# Altium PCB Power.PcbDoc
Units mm, origin at the board's own origin, x right, y up, seen from the top; angles counter-clockwise.
Board outline 60.5 x 33.5 mm, 2 copper layers (Top Layer, Bottom Layer); 11 components, 11 nets, 40 pads, 0 vias.
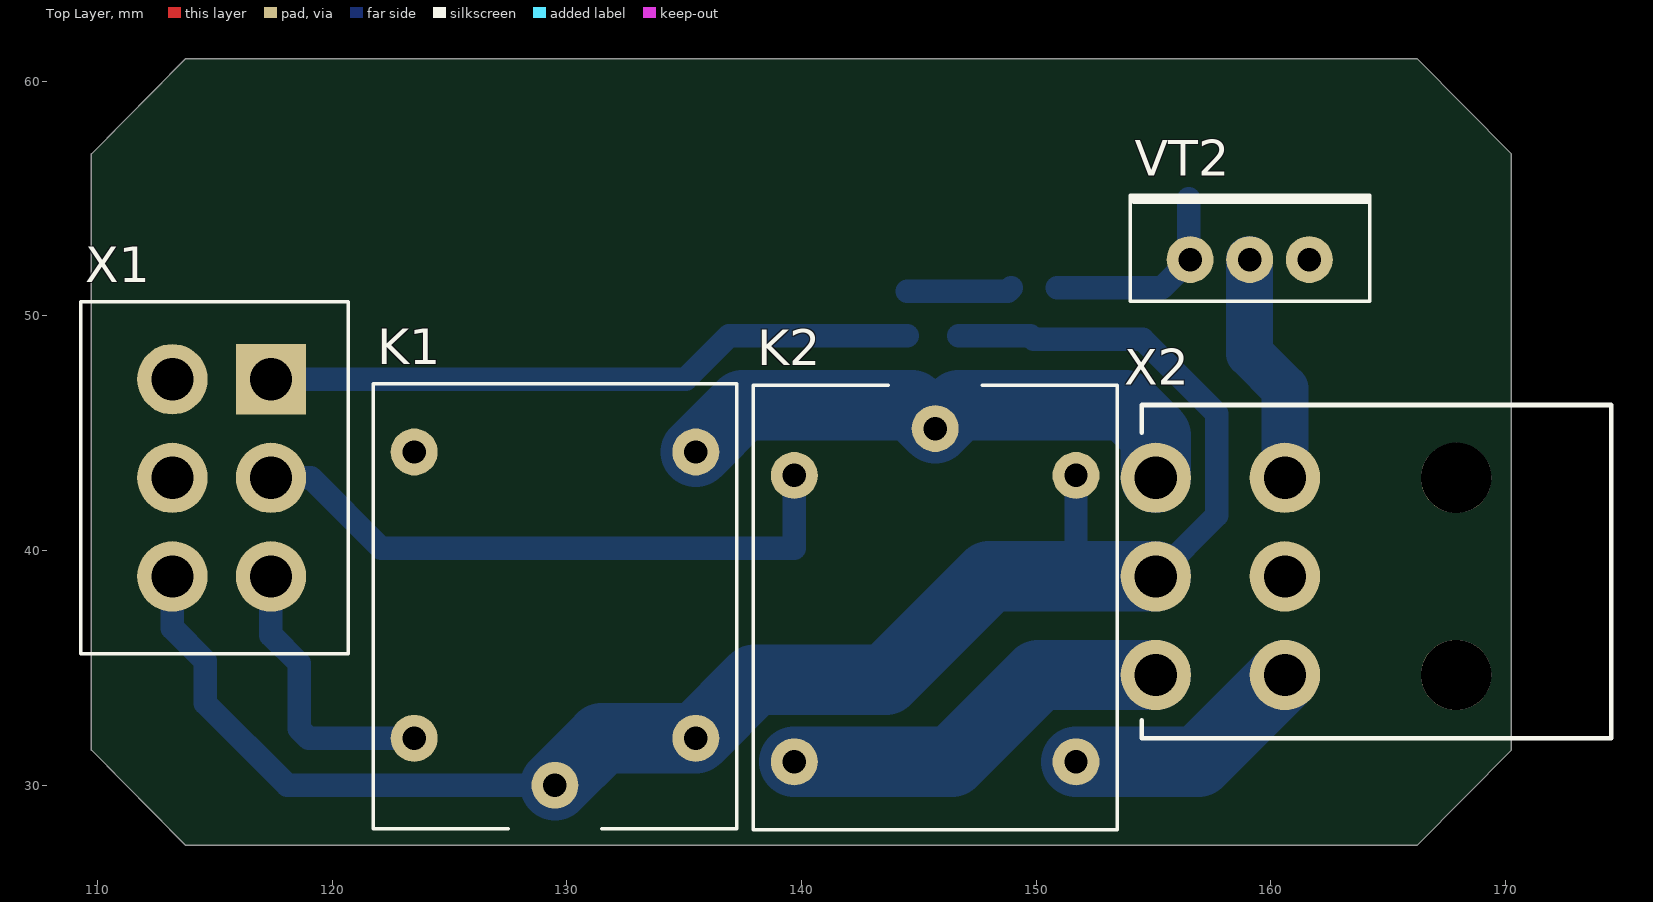
[diagram p0: Top Layer view]
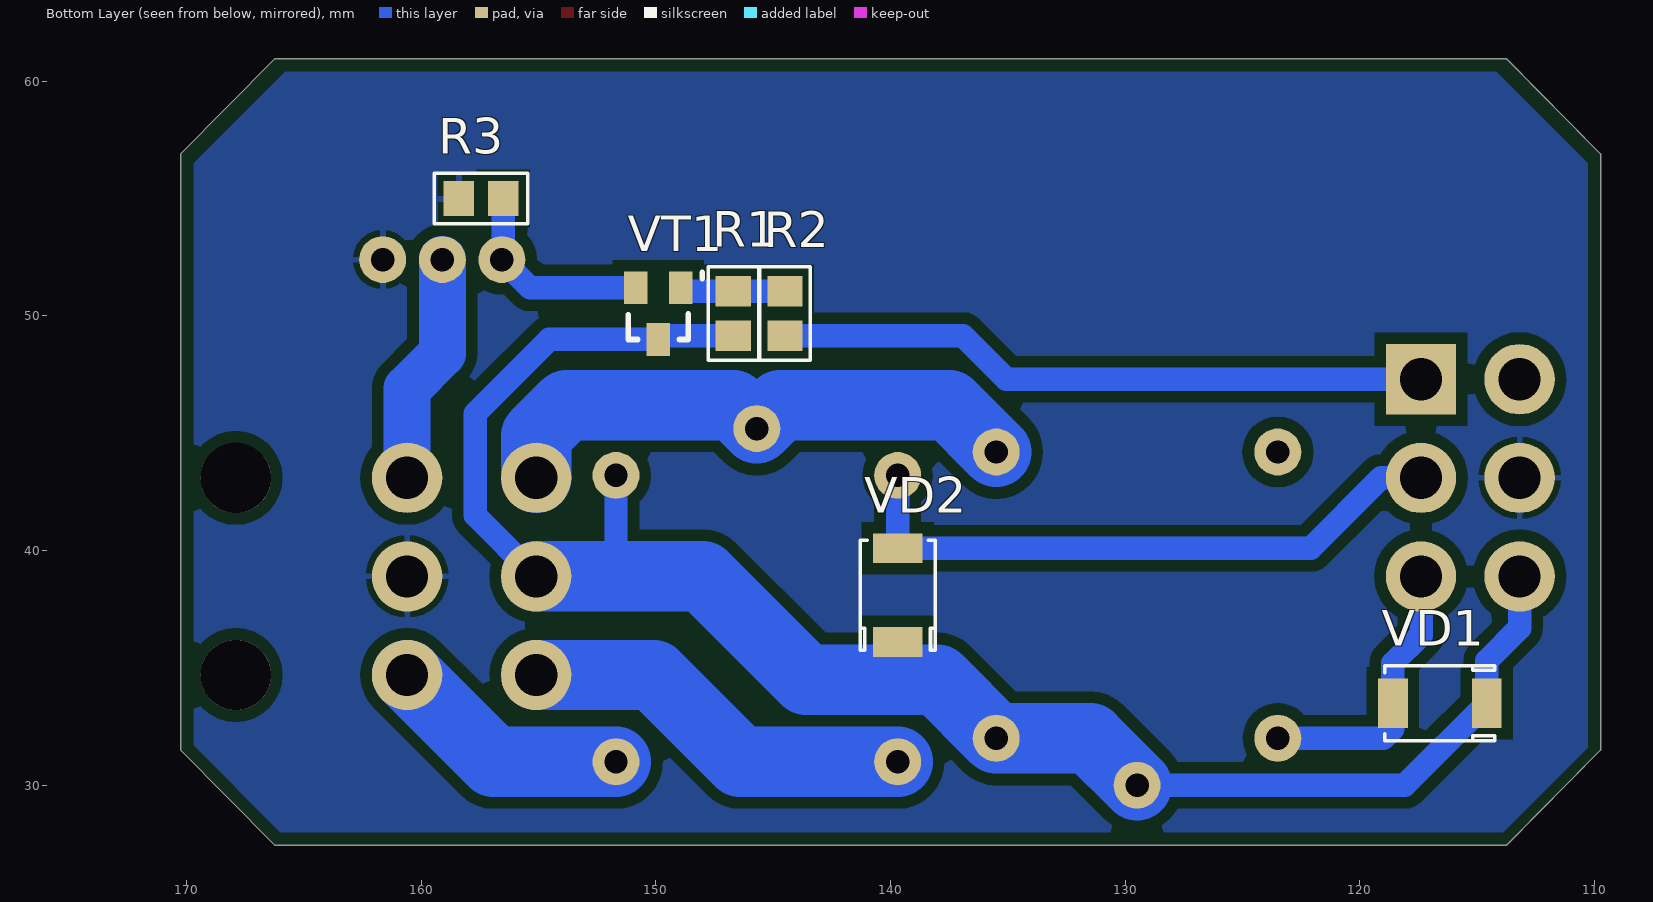
[diagram p1: Bottom Layer view, seen from below]
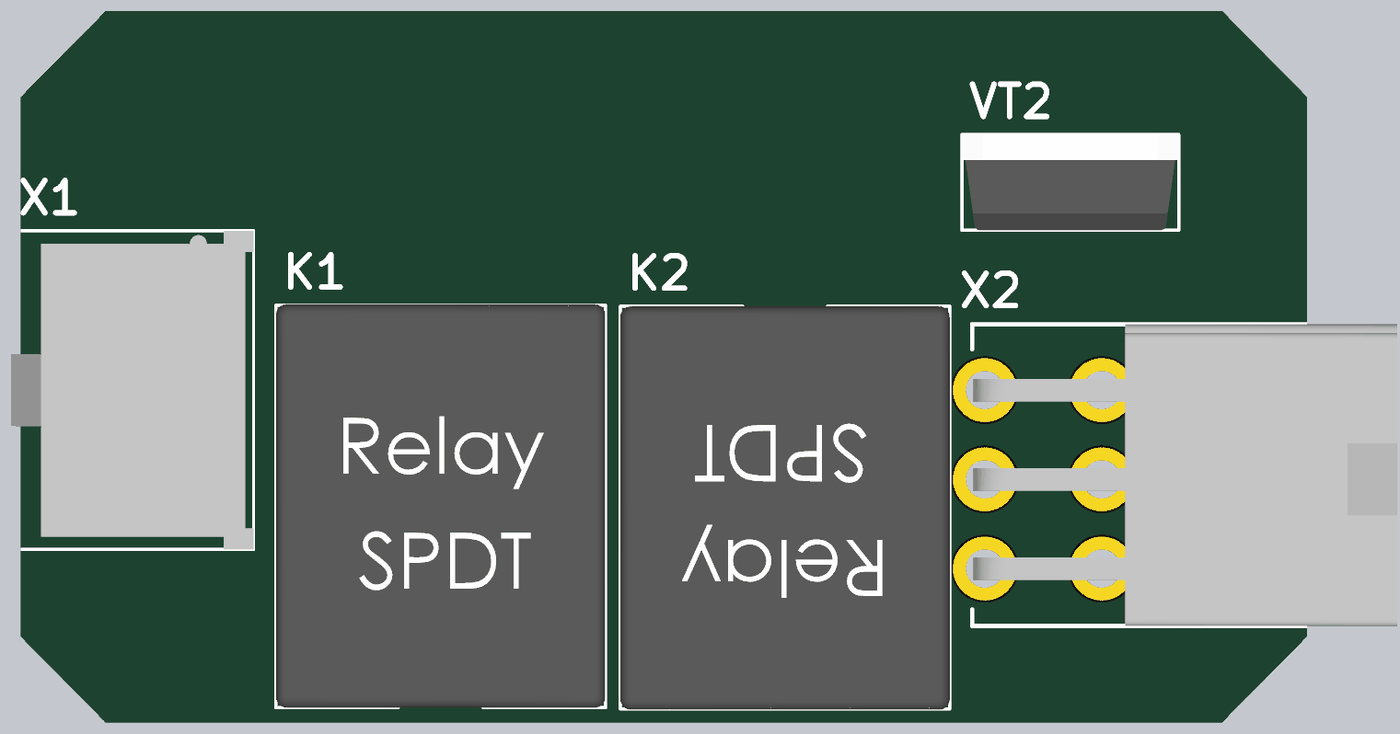
[diagram p2: 3D render of the assembled board from above, using the file's embedded part models]
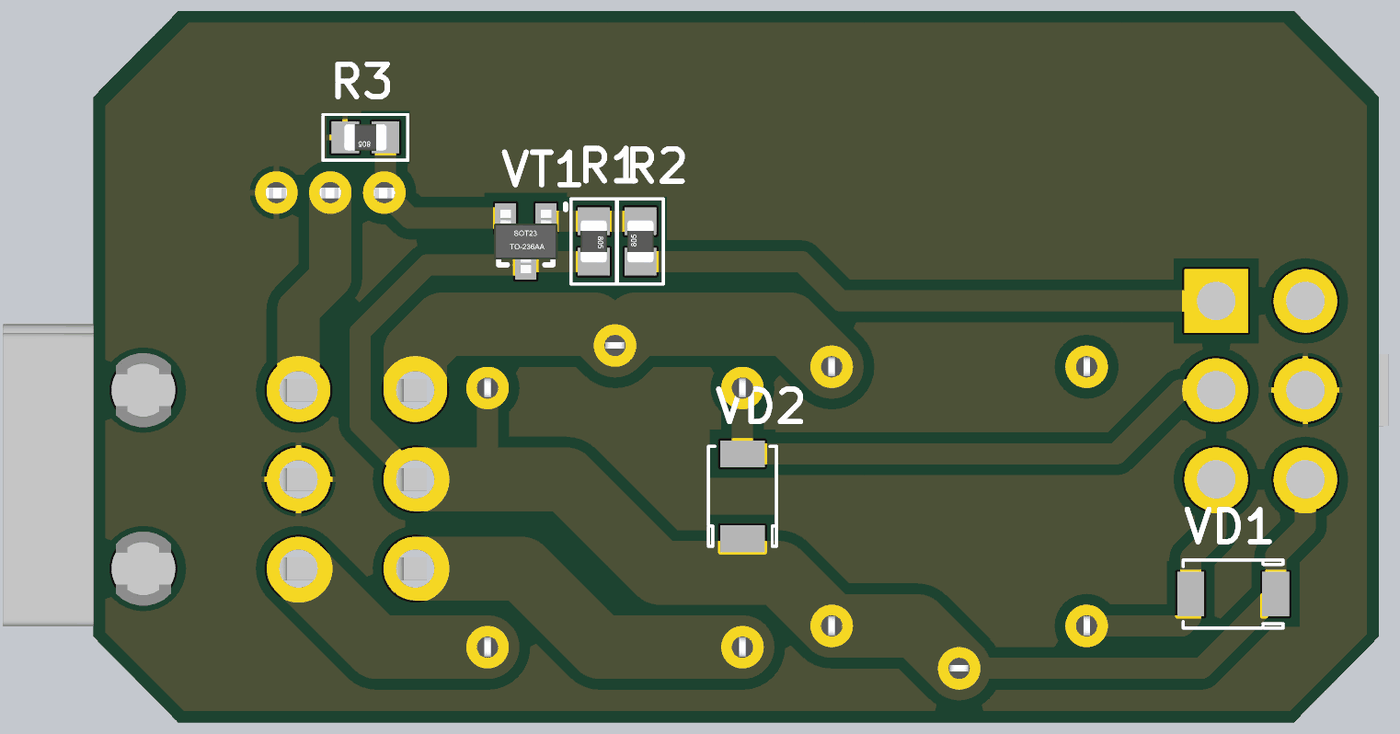
[diagram p3: 3D render of the assembled board from below, using the file's embedded part models]

## Layer stack, top to bottom
Top Solder: solder mask 0.0102, Solder Resist, Dk 3.5
Top Layer: signal copper 0.0356
Dielectric 1: dielectric 0.32, FR-4, Dk 4.8
Bottom Layer: signal copper 0.0356
Bottom Solder: solder mask 0.0102, Solder Resist, Dk 3.5

## Board outline
109.75,31.5 109.75,56.9 113.75,60.95 166.25,60.95 170.25,56.9 170.25,31.5 166.25,27.45 113.75,27.45

## Design rules (kind name [scope] priority, off if disabled: settings)
Clearance [All] p1: gap=0.5
PolygonConnect [All] p1: connectstyle=Relief reliefconductorwidth=0.254 reliefentries=4 polygonreliefangle="90 Angle" airgapwidth=0.254
RoutingVias [All] p1: holewidth=0.711 width=1.27 viastyle="Through Hole" minholewidth=0.711 minwidth=1.27 maxholewidth=0.711 maxwidth=1.27
SolderMaskExpansion [All] p1: expansion=0.102
Width [All] p1: maxlimit=6 minlimit=0.3 preferedwidth=0.5
30 further rules are at their usual default settings.

## Components (designator, comment, footprint, x,y, rotation, side; value= is the part's Value field where it differs from the comment)
K1 "Relay, SPDT" NRP07-C12D 129.5,38.1 r270 top
K2 "Relay, SPDT" NRP07-C12D 145.7,37.1 r90 top
R1 "Резистор" CHIP_0805_R 146.7,50.1 r270 bottom
R2 "Резистор" CHIP_0805_R 144.5,50.1 r90 bottom
R3 "Резистор" CHIP_0805_R 157.45,55 r0 bottom
VD1 "Diode, generic" SMA 116.6,33.5 r0 bottom
VD2 "Diode, generic" SMA 139.7,38.1 r90 bottom
VT1 "BJT, PNP" SOT-23 149.9,50.1 r0 bottom
VT2 "MOSFET, N-ch" TO-220 159.1,52.4 r0 top
X1 "MF 2x03 M(R)" "MF 2x03 V" 113.2,43.1 r90 top
X2 "MF 2x03 M(R)" "MF 2x03 R" 174.5,38.9 r90 top

## Footprints (in the part's own frame and the unit in brackets; to place one, negate y for a bottom-side part, rotate by r counter-clockwise, add the part's x,y. Pads: shape width x height; smd on the part's side, far side on the other; paste and mask are expansions set on the pad)
CHIP_0805_R [mm]
  rect 1.3x1.5 smd: 1(-0.95,0) 2(0.95,0)
  silkscreen extent -2,-1.08 2,1.07, body extent -1,-0.63 1,0.63, height 0.78
"MF 2x03 R" [mm]
  round 3 hole 1.8: 1(4.2,13.9) 2(0,13.9) 3(-4.2,13.9) 4(4.2,19.4) 5(0,19.4) 6(-4.2,19.4)
  round 3 hole 3 unplated: MH(-4.2,6.6) MH(4.2,6.6)
  silkscreen extent -6.9,0 7.3,20, body extent -6.9,0 7.3,19.93, height 11.4
"MF 2x03 V" [mm]
  rect 3x3 hole 1.8: 1(4.2,-4.2)
  round 3 hole 1.8: 2(0,-4.2) 3(-4.2,-4.2) 4(4.2,0) 5(0,0) 6(-4.2,0)
  silkscreen extent -7.5,-7.5 7.5,3.9, body extent -7.5,-7.5 7.5,3.9, height 13.5
NRP07-C12D [mm]
  round 2 hole 1 paste+0 mask+0: 1(6.1,-6) 2(6.1,6) 3(8.1,0) 4(-6.1,-6) 5(-6.1,6)
  silkscreen extent -9,-7.75 9.95,7.75, body extent -9.05,-7.75 9.95,7.75, height 15.81
SMA [mm]
  rect 1.27x2.1 smd: A(2,0) K(-2,0)
  silkscreen extent -2.35,-1.6 2.35,1.6
SOT-23 [mm]
  rect 1x1.4 smd: 1(-0.95,-1.1) 2(0.95,-1.1) 3(0,1.1)
  silkscreen extent -1.88,-1.75 1.28,1.1, body extent -1.5,-1.5 1.5,1.5, height 1.3
TO-220 [mm]
  round 2 hole 1 paste+0 mask+0: 1(-2.54,0) 2(0,0) 3(2.54,0)
  silkscreen extent -5.08,-1.77 5.12,2.73, body extent -5.08,-1.77 5.12,2.73, height 22.06

## Part data
K1 K2: "Реле, SPDT"
X1 X2: "MiniFit, 4.20mm 2x03"

## Nets (pads, with @x,y where several pads share a name; then routed paths per layer and width w, separated by ;. In a path a pad name is that pad's centre, name@x,y a point inside that pad or via, vN(x,y) a via of type N, cw(c..) or ccw(c..) an arc to the next point about the centre after c; other vN are vias at no path point)
BAT: K1.2 K1.3 K2.1 R1.2 VD1.K VD2.K VT1.3 X1.6 X2.5 | length 76.4
  Bottom Layer w1: X1.6 113.2,36.7 114.6,35.3 VD1.K 118.1,30 K1.3 ; R1.2 149.75,49.15 VT1.3 154.536,49 157.7,45.836 157.7,41.5 X2.5 ; K2.1 151.7,39.1 151.9,38.9
  Bottom Layer w3: K1.3 131.5,32 K1.2 138,34.5 143.6,34.5 148,38.9 151.9,38.9 X2.5
GND: R3.2 VT2.3 X1.5 X2.2
HORN: VT2.2 X2.1 | length 9.9
  Bottom Layer w2: VT2.2 159.1,48.4 160.6,46.9 X2.1
IG1: K2.4 X2.3 | length 10.4
  Bottom Layer w3: K2.4 156.9,31 X2.3
IG2: K1.5 K2.3 X2.4 | length 23.6
  Bottom Layer w3: K1.5 137.5,46.2 144.7,46.2 K2.3 146.7,46.2 153.8,46.2 155.1,44.9 X2.4
NetR1_1: R1.1 R2.2 VT1.1 | length 4.5
  Bottom Layer w1: R2.2 R1.1 148.8,51.05 VT1.1
NetR3_1: R3.1 VT1.2 VT2.1 | length 8.8
  Bottom Layer w1: VT1.2@150.9,51.2 155.36,51.2 VT2.1 156.5,52.46 R3.1
NHORN: R2.1 X1.1 | length 27.9
  Bottom Layer w1: X1.1 135.064,47.3 136.914,49.15 R2.1
NIG: K1.1 VD1.A X1.3 | length 12.1
  Bottom Layer w1: X1.3 117.4,36.4 118.6,35.2 VD1.A 118.6,32.4 119,32 K1.1
NSTART: K2.2 VD2.A X1.2 | length 26.6
  Bottom Layer w1: X1.2 119.1,43.1 122.1,40.1 VD2.A K2.2
START: K2.5 X2.6 | length 16.9
  Bottom Layer w3: K2.5 146.4,31 150.1,34.7 X2.6
pads on no net: K1.4 X1.4 X2.MH

## Polygon pours and split planes (outlines as drawn)
GND on Bottom Layer "GND" (solid, pour order 0): 110.3,56.5 114.2,60.4 165.8,60.4 169.7,56.5 169.7,31.7 166,28 113.9,28 110.3,31.6

## Silkscreen, mask and mechanical layers (free items; w line width, h text height)
Mechanical 1:
  rectangle: 107.3,24.9 172.2,62.1